# Altium PCB PCB.PcbDoc
Units mil, origin at the board's own origin, x right, y up, seen from the top; angles counter-clockwise.
Board outline 6000 x 4000 mil, 2 copper layers (Top Layer, Bottom Layer); 49 components, 26 nets, 98 pads, 0 vias.
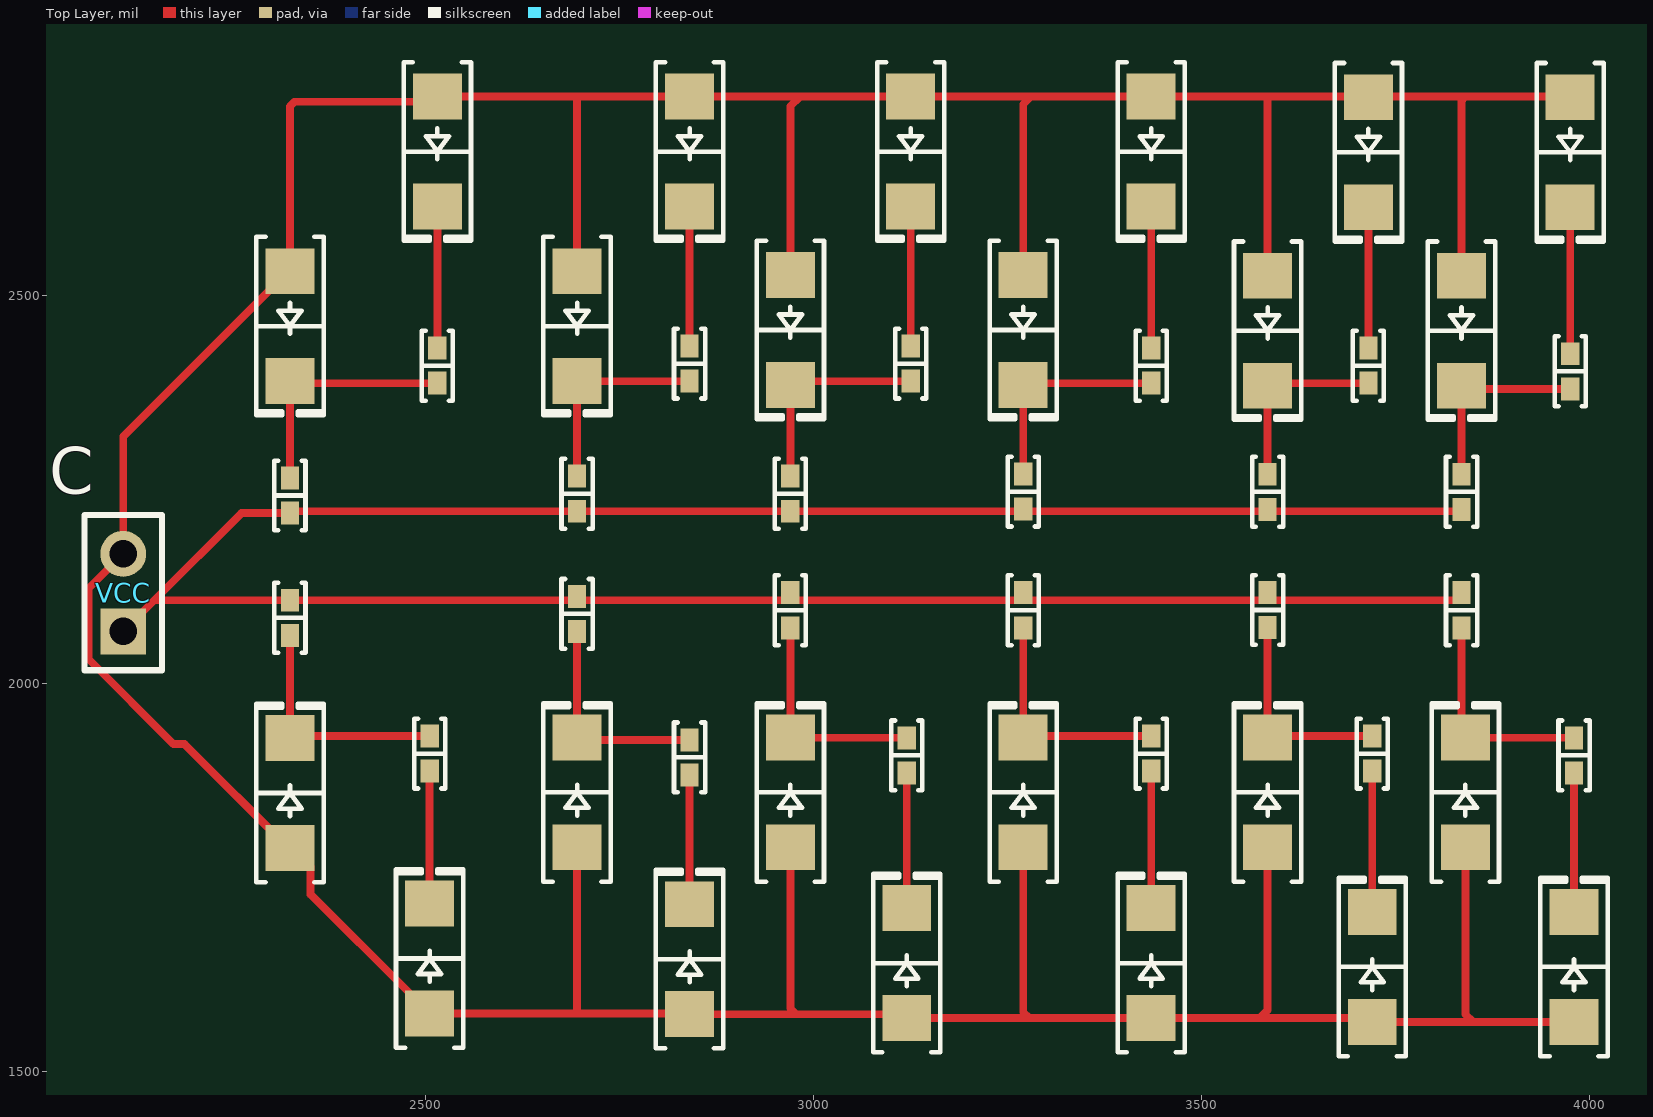
[diagram p0: Top Layer view]
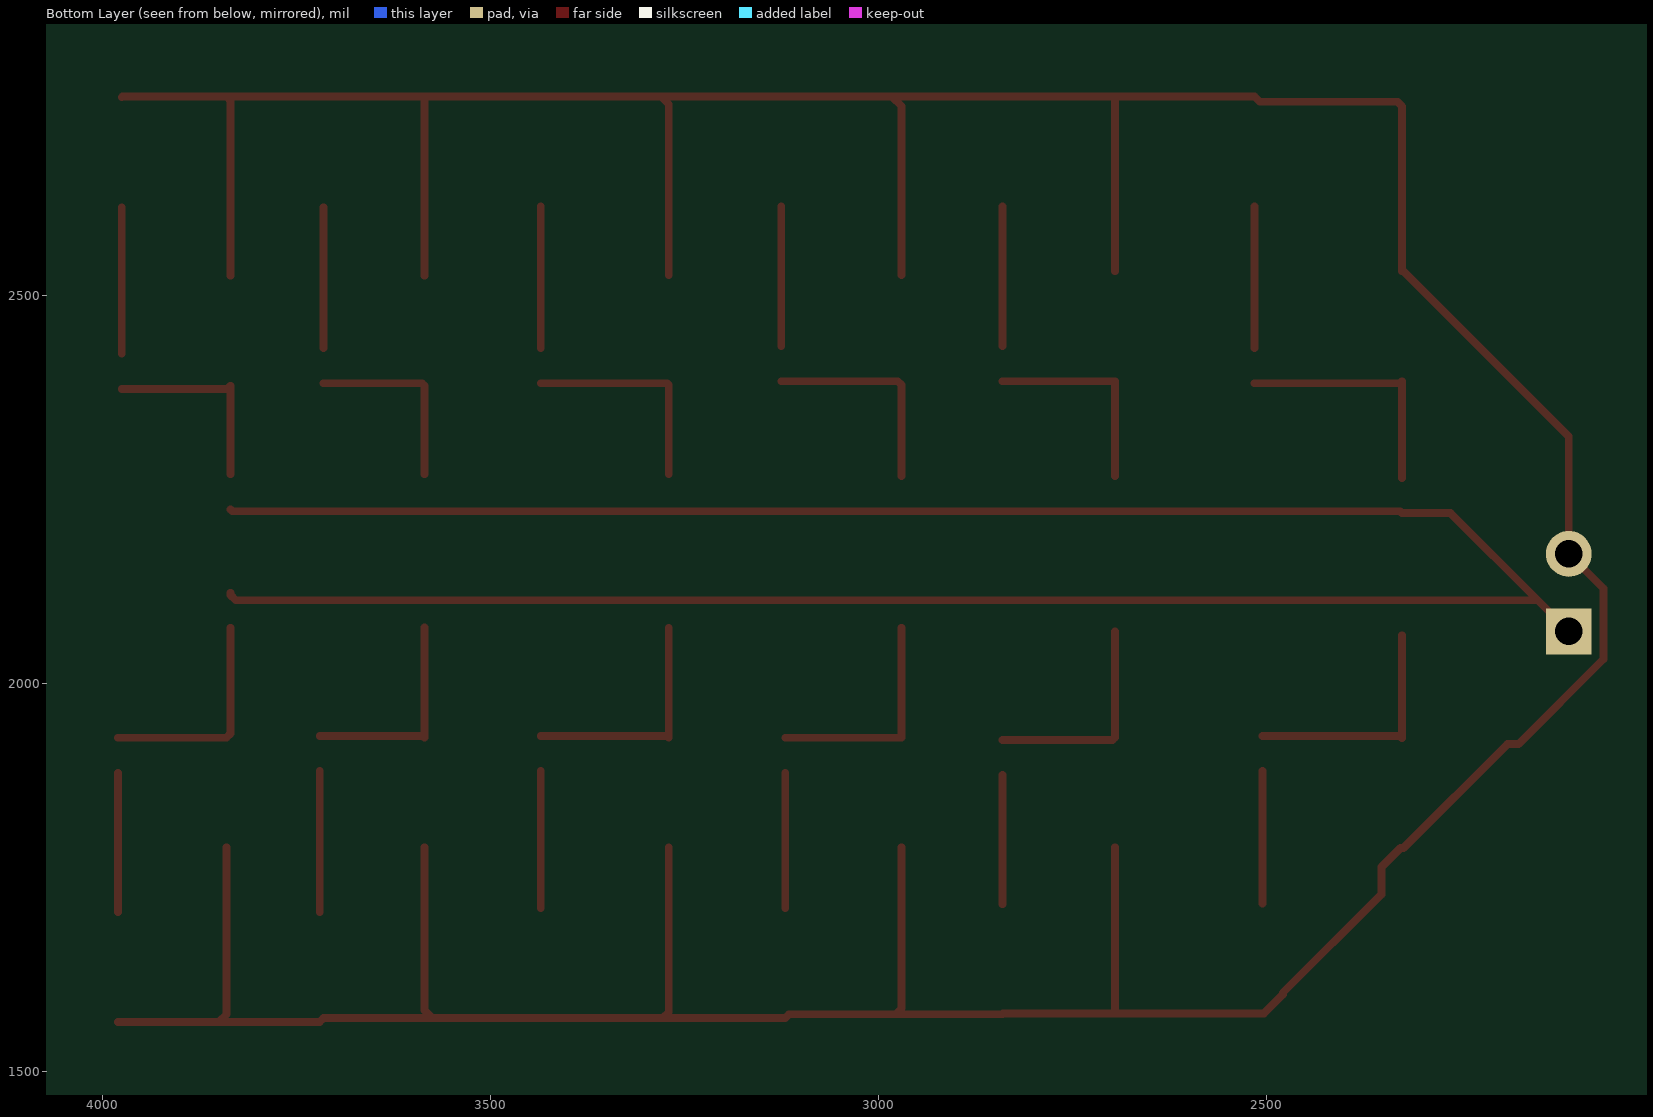
[diagram p1: Bottom Layer view, seen from below]

## Layer stack, top to bottom
Top Solder: solder mask 0.4, Solder Resist, Dk 3.5
Top Layer: signal copper 1.4
Dielectric 1: dielectric 12.6, FR-4, Dk 4.8
Bottom Layer: signal copper 1.4
Bottom Solder: solder mask 0.4, Solder Resist, Dk 3.5

## Board outline
1000,1000 7000,1000 7000,5000 1000,5000

## Design rules (kind name [scope] priority, off if disabled: settings)
Clearance [All] p1: gap=10 ignorepadtopadclearanceinfootprint=FALSE except(0: Arc-Hole Track-Hole SMDPad-Hole THPad-Hole Via-Hole Fill-Hole Poly-Hole Region-Hole Text-Hole)
PolygonConnect [All] p1: connectstyle=Relief reliefconductorwidth=10 reliefentries=4 polygonreliefangle="90 Angle" airgapwidth=10
RoomDefinition TOP [InComponentClass('TOP')] p1: confinementstyle=ConfineIn formatcopy=TRUE lockcomponents=FALSE outline 4240,1420 1925,1420 1925,2910 4240,2910
RoutingVias [All] p1: holewidth=28 width=50 viastyle="Through Hole" minholewidth=28 minwidth=50 maxholewidth=28 maxwidth=50
SolderMaskExpansion [All] p1: expansion=4 istentingtop=FALSE
Width [All] p1: maxlimit=10 minlimit=10 preferedwidth=10
30 further rules are at their usual default settings.

## Classes and differential pairs
component class TOP: " "

## Components (designator, comment, footprint, x,y, rotation, side; value= is the part's Value field where it differs from the comment)
A7B "240 Ohms" "RES 0402_1005" 2505,1910 r90 top
D1A "Red" "LED 1206_3216 RED" 2325,2460.87 r270 top
D1B "Red" "LED 1206_3216 RED" 2515,2685.87 r270 top
D2A "Red" "LED 1206_3216 RED" 2695,2460.87 r270 top
D2B "Red" "LED 1206_3216 RED" 2840,2685.87 r270 top
D3A "Red" "LED 1206_3216 RED" 2970,2455.87 r270 top
D3B "Red" "LED 1206_3216 RED" 3125,2685.87 r270 top
D4A "Red" "LED 1206_3216 RED" 3270,2455.87 r270 top
D4B "Red" "LED 1206_3216 RED" 3435,2685.87 r270 top
D5A "Red" "LED 1206_3216 RED" 3585,2455 r270 top
D5B "Red" "LED 1206_3216 RED" 3715,2685 r270 top
D6A "Red" "LED 1206_3216 RED" 3835,2455 r270 top
D6B "Red" "LED 1206_3216 RED" 3975,2685 r270 top
D7A "Red" "LED 1206_3216 RED" 2325,1859.13 r90 top
D7B "Red" "LED 1206_3216 RED" 2505,1645.87 r90 top
D8A "Red" "LED 1206_3216 RED" 2695,1860 r90 top
D8B "Red" "LED 1206_3216 RED" 2840,1645 r90 top
D9A "Red" "LED 1206_3216 RED" 2970,1860 r90 top
D9B "Red" "LED 1206_3216 RED" 3120,1640 r90 top
D10A "Red" "LED 1206_3216 RED" 3270,1860 r90 top
D10B "Red" "LED 1206_3216 RED" 3435,1640 r90 top
D11A "Red" "LED 1206_3216 RED" 3585,1860 r90 top
D11B "Red" "LED 1206_3216 RED" 3720,1635 r90 top
D12A "Red" "LED 1206_3216 RED" 3840,1860 r90 top
D12B "Red" "LED 1206_3216 RED" 3980,1635 r90 top
R1A "1 kOhms" "RES 0402_1005" 2325,2242.64 r90 top
R1B "240 Ohms" "RES 0402_1005" 2515,2410 r90 top
R2A "1 kOhms" "RES 0402_1005" 2695,2245 r90 top
R2B "240 Ohms" "RES 0402_1005" 2840,2412.64 r90 top
R3A "1 kOhms" "RES 0402_1005" 2970,2245 r90 top
R3B "240 Ohms" "RES 0402_1005" 3125,2412.64 r90 top
R4A "1 kOhms" "RES 0402_1005" 3270,2247.64 r90 top
R4B "240 Ohms" "RES 0402_1005" 3435,2410 r90 top
R5A "1 kOhms" "RES 0402_1005" 3585,2247.36 r90 top
R5B "240 Ohms" "RES 0402_1005" 3715,2410 r90 top
R6A "1 kOhms" "RES 0402_1005" 3835,2247.36 r90 top
R6B "240 Ohms" "RES 0402_1005" 3975,2402.64 r90 top
R7A "1 kOhms" "RES 0402_1005" 2325,2085 r90 top
R8A "1 kOhms" "RES 0402_1005" 2695,2090 r90 top
R8B "240 Ohms" "RES 0402_1005" 2840,1905 r90 top
R9A "1 kOhms" "RES 0402_1005" 2970,2094.72 r90 top
R9B "240 Ohms" "RES 0402_1005" 3120,1907.64 r90 top
R10A "1 kOhms" "RES 0402_1005" 3270,2094.72 r90 top
R10B "240 Ohms" "RES 0402_1005" 3435,1910 r90 top
R11A "1 kOhms" "RES 0402_1005" 3585,2095 r90 top
R11B "240 Ohms" "RES 0402_1005" 3720,1910 r90 top
R12A "1 kOhms" "RES 0402_1005" 3835,2094.72 r90 top
R12B "240 Ohms" "RES 0402_1005" 3980,1907.64 r90 top
VCC "Header 2" HDR1X2 2110,2067.36 r90 top (schematic designator P1)

## Footprints (in the part's own frame and the unit in brackets; to place one, negate y for a bottom-side part, rotate by r counter-clockwise, add the part's x,y. Pads: shape width x height; smd on the part's side, far side on the other; paste and mask are expansions set on the pad)
HDR1X2 [mm] "Connector; Header; 2 Position"
  rect 1.5x1.5 hole 0.9: 1(0,0)
  round 1.5 hole 0.9: 2(2.54,0)
  silkscreen extent -1.27,-1.27 3.81,1.27
"LED 1206_3216 RED" [mm] "Chip Diode, 2-Leads, Body 3.13x1.55mm, IPC Medium Density"
  rect 1.5x1.6 smd: 1(-1.8,0) 2(1.8,0)
  silkscreen extent -2.92,-1.1 2.92,1.1, body extent -1.6,-0.8 1.6,0.8, height 0.9
"RES 0402_1005" [mm] "Chip Resistor, 2-Leads, Body 1.0x0.5mm, IPC Medium Density"
  rect 0.75x0.6 smd: 1(-0.575,0) 2(0.575,0)
  silkscreen extent -1.14,-0.51 1.14,0.51, body extent -0.5,-0.25 0.5,0.25, height 0.35

## Part data
A7B R1B R2B R3B R4B R5B R6B R8B R9B R10B R11B R12B: library part RC0402FR-13240RL, "RES 240 OHM 1% 1/16W 0402", Device Package="0402 (1005 Metric)", Manufacturer=Yageo, Operating Temperature="-55°C ~ 155°C", Power (Watts)="0.063W, 1/16W", Supplier Device Package=0402, Supplier Part Number 1=13-RC0402FR-13240RLTR-ND, Temperature Coefficient=±100ppm/°C, Tolerance=±1%, ComponentLink1Description=Datasheet, ComponentLink1URL=https://www.yageo.com/upload/media/product/productsearch/datasheet/rchip/PYu-RC_Group_51_RoHS_L_11.pdf, ComponentLink2Description="DigiKey Link", ComponentLink2URL=https://www.digikey.com/en/products/detail/yageo/RC0402FR-13240RL/13694164, Composition="Thick Film", Features="Moisture Resistant", Height - Seated (Max)="0.016\" (0.40mm)", LastUpdated="9/19/2022 1:13:42 PM", Lifecycle Status=Active, Minimum Order=50000, Number of Terminations=2, Package / Case="0402 (1005 Metric)", Part Number=RC0402FR-13240RL, Part Status=Active, PartId=64892, Price=0, Resistance="240 Ohms", Series=RC_L, Size / Dimension="0.039\" L x 0.020\" W (1.00mm x 0.50mm)", Supplier 1=DigiKey
D1A D1B D2A D2B D3A D3B D4A D4B D5A D5B D6A D6B D7A D7B D8A D8B D9A D9B D10A D10B D11A D11B D12A D12B: library part APTR3216SECK/J3-PRV, "LED SMD", Current - Test=20mA, Device Package="1206 (3216 Metric)", Lens Color=Colorless, Manufacturer=Kingbright, Millicandela Rating=350mcd, Supplier Device Package=1206, Supplier Part Number 1=754-APTR3216SECK/J3-PRVCT-ND, Voltage - Forward (Vf) (Typ)=2.2V, Color=Red, ComponentLink1Description=Datasheet, ComponentLink1URL=http://www.kingbrightusa.com/images/catalog/SPEC/APTR3216SECK-J3-PRV.pdf, ComponentLink2Description="DigiKey Link", ComponentLink2URL=https://www.digikey.com/en/products/detail/kingbright/APTR3216SECK-J3-PRV/10293085, Configuration=1206, Height (Max)=1.25mm, LastUpdated="2022-09-19 1:50:50 PM", Lens Size="1.60mm x 1.40mm", Lens Style="Rectangle with Flat Top", Lens Transparency=Clear, Lifecycle Status=Active, Minimum Order=1, Mounting Type="Surface Mount", Package / Case="1206 (3216 Metric)", Packaging=TapeAndReel, Part Number=APTR3216SECK/J3-PRV, Part Status=Active, PartId=194, Price=0.17, Series=Heli-R, Size / Dimension="3.20mm L x 1.60mm W", Supplier 1=DigiKey, Viewing Angle=140°, Wavelength - Dominant=625nm, Wavelength - Peak=640nm
R1A R2A R3A R4A R5A R6A R7A R8A R9A R10A R11A R12A: library part AT0402BRD071KL, "RES SMD 1K OHM 0.1% 1/16W 0402", Device Package="0402 (1005 Metric)", Manufacturer=Yageo, Operating Temperature="-55°C ~ 155°C", Power (Watts)="0.063W, 1/16W", Ratings=AEC-Q200, Supplier Device Package=0402, Supplier Part Number 1=YAG2088CT-ND, Temperature Coefficient=±25ppm/°C, Tolerance=±0.1%, ComponentLink1Description=Datasheet, ComponentLink1URL=http://www.yageo.com/documents/recent/PYu-AT_51_RoHS_L_5.pdf, ComponentLink2Description="DigiKey Link", ComponentLink2URL=https://www.digikey.com/en/products/detail/yageo/AT0402BRD071KL/5138607, Composition="Thin Film", Features="Anti-Sulfur, Automotive AEC-Q200, Moisture Resistant", Height - Seated (Max)="0.014\" (0.35mm)", LastUpdated="2022-09-19 1:15:04 PM", Lifecycle Status=Active, Minimum Order=1, Number of Terminations=2, Package / Case="0402 (1005 Metric)", Packaging=TapeAndReel, Part Number=AT0402BRD071KL, Part Status=Active, PartId=2462, Price=0.09, Resistance="1 kOhms", Series=AT, Size / Dimension="0.039\" L x 0.020\" W (1.00mm x 0.50mm)", Supplier 1=DigiKey
VCC: "Header, 2-Pin", LatestRevisionDate=17-Jul-2002, LatestRevisionNote="Re-released for DXP Platform.", Publisher="Altium Limited"

## Nets (pads, with @x,y where several pads share a name; then routed paths per layer and width w, separated by ;. In a path a pad name is that pad's centre, name@x,y a point inside that pad or via, vN(x,y) a via of type N, cw(c..) or ccw(c..) an arc to the next point about the centre after c; other vN are vias at no path point)
GND: R1A.1 R2A.1 R3A.1 R4A.1 R5A.1 R6A.1 R7A.2 R8A.2 R9A.2 R10A.2 R11A.2 R12A.2 VCC.1 | length 3480.6
  Top Layer w10: VCC.1 2150.28,2107.64 ; R12A.2 3835,2114.45 3828.19,2107.64 R7A.2 2150.28,2107.64 ; R6A.1 3832.64,2222.36 R3A.1 R2A.1 2327.36,2222.36 R1A.1 2262.64,2220 2150.28,2107.64
NetA7B_1: A7B.1 D7B.2 | length 170.6
  Top Layer w10: D7B.2 A7B.1
NetA7B_2: A7B.2 D7A.2 R7A.1 | length 313.5
  Top Layer w10: R7A.1 D7A.2 2327.64,1932.64 A7B.2
NetD1A_2: D1A.2 R1A.2 R1B.1 | length 315.8
  Top Layer w10: R1A.2 D1A.2 2327.64,2387.36 R1B.1
NetD1B_2: D1B.2 R1B.2 | length 182.4
  Top Layer w10: R1B.2 D1B.2
NetD2A_2: D2A.2 R2A.2 R2B.1 | length 267.4
  Top Layer w10: R2A.2 D2A.2 R2B.1
NetD2B_2: D2B.2 R2B.2 | length 179.7
  Top Layer w10: R2B.2 D2B.2
NetD3A_2: D3A.2 R3A.2 R3B.1 | length 274.4
  Top Layer w10: R3A.2 D3A.2 2975,2390 R3B.1
NetD3B_2: D3B.2 R3B.2 | length 179.7
  Top Layer w10: R3B.2 D3B.2
NetD4A_2: D4A.2 R4A.2 R4B.1 | length 280.7
  Top Layer w10: R4A.2 D4A.2 3272.36,2387.36 R4B.1
NetD4B_2: D4B.2 R4B.2 | length 182.4
  Top Layer w10: R4B.2 D4B.2
NetD5A_2: D5A.2 R5A.2 R5B.1 | length 245.5
  Top Layer w10: R5A.2 D5A.2 3588.23,2387.36 R5B.1
NetD5B_2: D5B.2 R5B.2 | length 181.5
  Top Layer w10: R5B.2 D5B.2
NetD6A_2: D6A.2 R6A.2 R6B.1 | length 255.8
  Top Layer w10: R6A.2 D6A.2 3839.13,2380 R6B.1
NetD6B_2: D6B.2 R6B.2 | length 188.9
  Top Layer w10: R6B.2 D6B.2
NetD8A_2: D8A.2 R8A.1 R8B.2 | length 282.8
  Top Layer w10: R8A.1 D8A.2 2698.23,1927.64 R8B.2
NetD8B_2: D8B.2 R8B.1 | length 166.5
  Top Layer w10: D8B.2 R8B.1
NetD9A_2: D9A.2 R9A.1 R9B.2 | length 291.5
  Top Layer w10: R9A.1 D9A.2 2970.59,1930.28 R9B.2
NetD9B_2: D9B.2 R9B.1 | length 174.1
  Top Layer w10: D9B.2 R9B.1
NetD10A_2: D10A.2 R10A.1 R10B.2 | length 307
  Top Layer w10: R10A.1 D10A.2 3271.77,1932.64 R10B.2
NetD10B_2: D10B.2 R10B.1 | length 176.5
  Top Layer w10: D10B.2 R10B.1
NetD11A_2: D11A.2 R11A.1 R11B.2 | length 277.2
  Top Layer w10: R11A.1 D11A.2 3586.77,1932.64 R11B.2
NetD11B_2: D11B.2 R11B.1 | length 181.5
  Top Layer w10: D11B.2 R11B.1
NetD12A_2: D12A.2 R12A.1 R12B.2 | length 283.5
  Top Layer w10: R12A.1 3835,1935.87 D12A.2 3840.59,1930.28 R12B.2
NetD12B_2: D12B.2 R12B.1 | length 179.1
  Top Layer w10: D12B.2 R12B.1
VBATT: D1A.1 D1B.1 D2A.1 D2B.1 D3A.1 D3B.1 D4A.1 D4B.1 D5A.1 D5B.1 D6A.1 D6B.1 D7A.1 D7B.1 D8A.1 D8B.1 D9A.1 D9B.1 D10A.1 D10B.1 D11A.1 D11B.1 D12A.1 D12B.1 VCC.2 | length 6873.5
  Top Layer w10: D8A.1 2695,1575 ; D2A.1 2695,2756.73 ; D9A.1 2970,1581.63 2977.5,1574.13 ; D3A.1 2970,2744.23 2982.5,2756.73 ; D10A.1 3270,1576.63 3277.5,1569.13 ; D4A.1 3270,2746.73 3280,2756.73 ; D11A.1 3585,1579.13 3575,1569.13 ; D5A.1 3585,2756.73 ; D6A.1 3835,2751.73 3840,2756.73 ; D12A.1 3840,1574.13 3850,1564.13 ; D6B.1 3974.13,2756.73 3840,2756.73 ; D12B.1 3850,1564.13 ; 2695,1575 2839.13,1575 D8B.1 2977.5,1574.13 ; 2695,1575 D7B.1 2503.03,1575 2478.5,1599.53 2478.5,1601.5 2351.5,1728.5 2351.5,1763.74 2326.97,1788.27 D7A.1 2323.03,1788.27 2189.09,1922.21 2174.89,1922.21 2065.47,2031.62 2065.47,2122.83 VCC.2 2110,2318.7 2323.03,2531.73 D1A.1 2325,2744.14 2330.86,2750 2508.27,2750 D1B.1 2695,2756.73 ; 2695,2756.73 D2B.1 2982.5,2756.73 ; 2977.5,1574.13 3115,1574.13 D9B.1 3277.5,1569.13 ; 2982.5,2756.73 D3B.1 3280,2756.73 ; 3277.5,1569.13 D10B.1 3575,1569.13 ; 3280,2756.73 D4B.1 3585,2756.73 ; 3575,1569.13 3715,1569.13 D11B.1 3850,1564.13 ; 3585,2756.73 3840,2756.73